# Altium PCB SIGFOX-PCB-RULER.PcbDoc
Units mm, origin at the board's own origin, x right, y up, seen from the top; angles counter-clockwise.
Board outline 154.95 x 25.41 mm, 2 copper layers (Top Layer, Bottom Layer); 69 components, 2 nets, 316 pads, 19 vias.
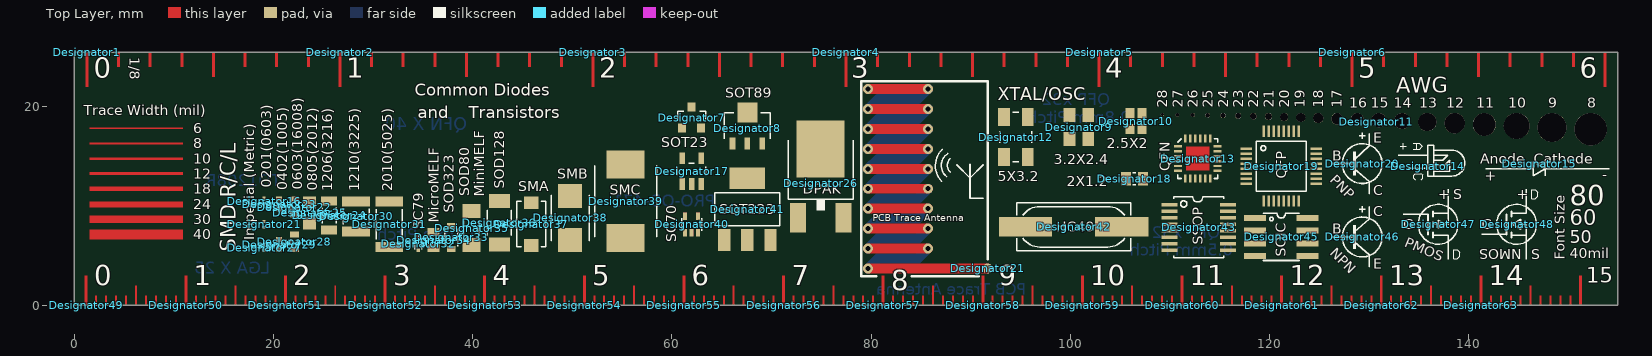
[diagram p0: Top Layer view]
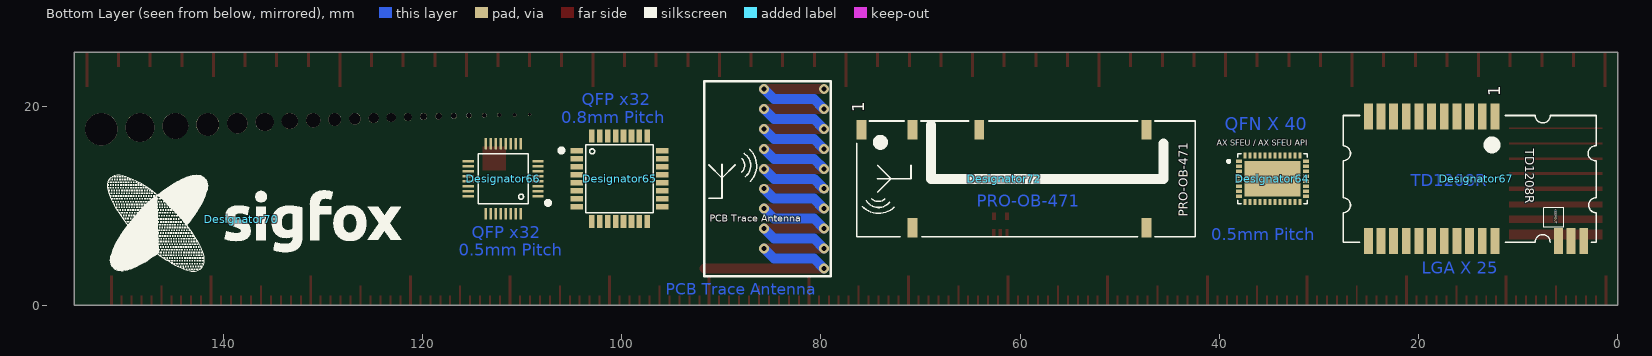
[diagram p1: Bottom Layer view, seen from below]

## Layer stack, top to bottom
Top Layer: signal copper 0.0356
Dielectric: dielectric 0.32, FR-4, Dk 4.8
Bottom Layer: signal copper 0.0356

## Board outline
-0.004,-0.004 154.944,-0.004 154.944,25.404 -0.004,25.404

## Design rules (kind name [scope] priority, off if disabled: settings)
Clearance [All] p1: gap=0.127
HoleToHoleClearance [All] p1: gap=0.025 allowstackedmicrovias=TRUE
MinimumSolderMaskSliver [All] p1: minsoldermaskwidth=0.051
PolygonConnect [All] p1: connectstyle=Relief reliefconductorwidth=0.254 reliefentries=4 polygonreliefangle="90 Angle"
RoutingVias [All] p1: holewidth=0.711 width=1.27 viastyle="Through Hole" minholewidth=0.711 minwidth=1.27 maxholewidth=0.711 maxwidth=1.27
SilkToSilkClearance [All] p1: silktosilkclearance=0.051
SilkscreenOverComponentPads [All] p1: minsilkscreentomaskgap=0.051
SolderMaskExpansion [All] p1: expansion=0.064
Width [All] p1: maxlimit=0.254 minlimit=0.254 preferedwidth=0.254
24 further rules are at their usual default settings.

## Components (designator, comment, footprint, x,y, rotation, side; value= is the part's Value field where it differs from the comment)
Designator1 "Comment" EDGE-INCHES-EIGTH 1.27,25.4 r0 top (schematic designator E$17)
Designator2 "Comment" EDGE-INCHES-EIGTH 26.67,25.4 r0 top (schematic designator E$18)
Designator3 "Comment" EDGE-INCHES-EIGTH 52.07,25.4 r0 top (schematic designator E$19)
Designator4 "Comment" EDGE-INCHES-EIGTH 77.47,25.4 r0 top (schematic designator E$20)
Designator5 "Comment" EDGE-INCHES-EIGTH 102.87,25.4 r0 top (schematic designator E$21)
Designator6 "Comment" EDGE-INCHES-EIGTH 128.27,25.4 r0 top (schematic designator E$22)
Designator7 "Comment" SOT23-3 61.976,18.796 r0 top (schematic designator E$34)
Designator8 "Comment" SOT89 67.564,18.034 r0 top (schematic designator E$32)
Designator9 "Comment" CRYSTAL-SMD-3.2X2.5 100.838,17.882 r90 top (schematic designator E$37)
Designator10 "Comment" CRYSTAL-SMD-2.5X2 106.578,18.491 r90 top (schematic designator E$38)
Designator11 "Comment" ALL-HOLES 109.22,19.304 r0 top (schematic designator E$46)
Designator12 "Comment" CRYSTAL-SMD-5X3.2 94.513,16.891 r90 top (schematic designator E$36)
Designator13 "Comment" QFN-24 112.776,14.732 r0 top (schematic designator E$55)
Designator14 "Comment" LED-GUIDE 135.89,13.97 r270 top (schematic designator E$53)
Designator15 "Comment" DIODE-SYMB 147.066,14.224 r0 top (schematic designator E$52)
Designator16 "Comment" 0201 19.05,10.465 r90 top (schematic designator E$16)
Designator17 "Comment" SOT23-5 61.976,13.462 r0 top (schematic designator E$33)
Designator18 "Comment" XTAL-2X1.2 106.426,12.7 r0 top (schematic designator E$40)
Designator19 "Comment" TQFP32-5MM 121.158,13.97 r0 top (schematic designator E$58)
Designator20 "Comment" PNP-SYMB 129.286,14.224 r0 top (schematic designator E$59)
Designator21 "Comment" 0201 19.05,8.128 r90 top (schematic designator E$63)
Designator21 "Comment" "PCB antenna 868 MHz or 915/920 MHz" 91.694,3.7 r90 top
Designator22 "Comment" 0603 22.098,9.855 r90 top (schematic designator E$24)
Designator23 "Comment" 0402 20.574,10.16 r90 top (schematic designator E$23)
Designator24 "Comment" 1206 25.578,9.017 r90 top (schematic designator E$26)
Designator25 "Comment" 0805 23.622,9.271 r90 top (schematic designator E$25)
Designator26 "Comment" DPAK 74.93,14.097 r0 top (schematic designator E$29)
Designator27 "Comment" 0201 19.05,5.791 r90 top (schematic designator E$60)
Designator28 "Comment" 0603 22.098,6.375 r90 top (schematic designator E$62)
Designator29 "Comment" 0402 20.574,6.096 r90 top (schematic designator E$61)
Designator30 "Comment" 1210 28.296,8.915 r270 top (schematic designator E$27)
Designator31 "Comment" 2010 31.623,8.128 r90 top (schematic designator E$28)
Designator32 "Comment" SC79_INFINEON 34.544,6.198 r90 top (schematic designator E$42)
Designator33 "Comment" SOD-323 37.846,6.807 r270 top (schematic designator E$48)
Designator34 "Comment" MICROMELF-R 36.068,6.553 r90 top (schematic designator E$41)
Designator35 "Comment" SOD80C 39.878,7.747 r90 top (schematic designator E$49)
Designator36 "Comment" SOD-128 42.672,8.28 r90 top (schematic designator E$47)
Designator37 "Comment" SMA-DIODE 45.872,8.153 r270 top (schematic designator E$43)
Designator38 "Comment" SMB-DIODE 49.784,8.763 r90 top locked (schematic designator E$44)
Designator39 "Comment" SMC 55.347,10.439 r90 top (schematic designator E$45)
Designator40 "Comment" SC70 61.976,8.128 r0 top (schematic designator E$35)
Designator41 "Comment" SOT223 67.564,9.652 r0 top (schematic designator E$31)
Designator42 "Comment" HC49UP 100.33,7.874 r0 top (schematic designator E$39)
Designator43 "Comment" TSSOP16 112.776,7.874 r270 top (schematic designator E$56)
Designator45 "Comment" SO08 121.158,6.858 r270 top (schematic designator E$57)
Designator46 "Comment" NPN-SYMB 129.286,6.858 r0 top (schematic designator E$54)
Designator47 "Comment" PMOS-SYMB 136.906,8.128 r0 top (schematic designator E$51)
Designator48 "Comment" NMOS-SYMB 144.78,8.128 r0 top (schematic designator E$50)
Designator49 "Comment" EDGE-MILLIMETERS 1.2,0 r0 top (schematic designator E$1)
Designator50 "Comment" EDGE-MILLIMETERS 11.2,0 r0 top (schematic designator E$2)
Designator51 "Comment" EDGE-MILLIMETERS 21.2,0 r0 top (schematic designator E$3)
Designator52 "Comment" EDGE-MILLIMETERS 31.2,0 r0 top (schematic designator E$4)
Designator53 "Comment" EDGE-MILLIMETERS 41.2,0 r0 top (schematic designator E$5)
Designator54 "Comment" EDGE-MILLIMETERS 51.2,0 r0 top (schematic designator E$6)
Designator55 "Comment" EDGE-MILLIMETERS 61.2,0 r0 top (schematic designator E$7)
Designator56 "Comment" EDGE-MILLIMETERS 71.2,0 r0 top (schematic designator E$8)
Designator57 "Comment" EDGE-MILLIMETERS 81.2,0 r0 top (schematic designator E$9)
Designator58 "Comment" EDGE-MILLIMETERS 91.2,0 r0 top (schematic designator E$10)
Designator59 "Comment" EDGE-MILLIMETERS 101.2,0 r0 top (schematic designator E$11)
Designator60 "Comment" EDGE-MILLIMETERS 111.2,0 r0 top (schematic designator E$12)
Designator61 "Comment" EDGE-MILLIMETERS 121.2,0 r0 top (schematic designator E$13)
Designator62 "Comment" EDGE-MILLIMETERS 131.2,0 r0 top (schematic designator E$14)
Designator63 "Comment" EDGE-MILLIMETERS 141.2,0 r0 top (schematic designator E$15)
Designator64 "Comment" QFN50P700X500X100-40N 34.659,12.7 r180 bottom
Designator65 "Comment" TQFP32-08 100.203,12.7 r0 bottom (schematic designator E$69)
Designator66 "Comment" TQFP32-5MM 111.887,12.7 r0 bottom (schematic designator E$70)
Designator67 "Comment" LGA25 14.224,12.7 r270 bottom
Designator70 "Comment" sigfox_logo 138.176,8.636 r180 bottom
Designator72 "Comment" PRO-OB-471 61.595,12.7 r90 bottom

## Footprints (in the part's own frame and the unit in brackets; to place one, negate y for a bottom-side part, rotate by r counter-clockwise, add the part's x,y. Pads: shape width x height; smd on the part's side, far side on the other; paste and mask are expansions set on the pad)
0201 [mm]
  rect 0.3x0.3 smd: P$1(-0.3,0) P$2(0.3,0)
0402 [mm]
  rect 0.5x0.6 smd: 1(-0.5,0) 2(0.5,0)
  silkscreen extent -0.1,-0.2 0.1,0.2
0603 [mm]
  rect 0.6x0.9 smd: 1(-0.75,0) 2(0.75,0)
  silkscreen extent -0.25,-0.35 0.25,0.35
0805 [mm]
  rect 1.2x1.3 smd: 1(-1.05,0) 2(1.05,0)
  silkscreen extent -0.2,-0.55 0.2,0.55
1206 [mm]
  rect 0.9x1.6 smd: 1(-1.45,0) 2(1.45,0)
  silkscreen extent -0.8,-0.7 0.8,0.7
1210 [mm]
  rect 1x2.8 smd: 1(-1.5,0) 2(1.5,0)
  silkscreen extent -0.8,-1.3 0.8,1.3
2010 [mm]
  rect 1x2.8 smd: P$1(-2.3,0) P$2(2.3,0)
  silkscreen extent -1.5,-1.3 1.5,1.3
ALL-HOLES [mm]
  round 0.321 hole 0.321 unplated: ""(0,-0.161)
  round 0.361 hole 0.361 unplated: ""(1.524,-0.18)
  round 0.405 hole 0.405 unplated: ""(3.048,-0.202)
  round 0.455 hole 0.455 unplated: ""(4.572,-0.228)
  round 0.511 hole 0.511 unplated: ""(6.096,-0.255)
  round 0.573 hole 0.573 unplated: ""(7.62,-0.287)
  round 0.644 hole 0.644 unplated: ""(9.144,-0.322)
  round 0.723 hole 0.723 unplated: ""(10.668,-0.361)
  round 0.812 hole 0.812 unplated: ""(12.235,-0.406)
  round 0.912 hole 0.912 unplated: ""(13.898,-0.456)
  round 1.02 hole 1.02 unplated: ""(15.663,-0.51)
  round 1.15 hole 1.15 unplated: ""(17.549,-0.575)
  round 1.29 hole 1.29 unplated: ""(19.568,-0.645)
  round 1.45 hole 1.45 unplated: ""(21.739,-0.725)
  round 1.63 hole 1.63 unplated: ""(24.078,-0.815)
  round 1.83 hole 1.83 unplated: ""(26.609,-0.915)
  round 2.05 hole 2.05 unplated: ""(29.348,-1.025)
  round 2.3 hole 2.3 unplated: ""(32.324,-1.15)
  round 2.59 hole 2.59 unplated: ""(35.568,-1.295)
  round 2.91 hole 2.91 unplated: ""(39.119,-1.455)
  round 3.26 hole 3.26 unplated: ""(43.003,-1.63)
CRYSTAL-SMD-2.5X2 [mm]
  rect 1.05x0.9 smd: 1(-0.795,-0.6) 2(0.795,-0.6) 3(0.795,0.6) 4(-0.795,0.6)
CRYSTAL-SMD-3.2X2.5 [mm]
  rect 1.4x1.2 smd: 1(-1.2,-0.95) 2(1.2,-0.95) 3(1.2,0.95) 4(-1.2,0.95)
CRYSTAL-SMD-5X3.2 [mm]
  rect 1.8x1.2 smd: 1(-2,-1.2) 2(2,-1.2) 3(2,1.2) 4(-2,1.2)
  silkscreen extent -2.5,-1.6 2.5,1.6
DIODE-SYMB [mm]
  silkscreen extent -5.4,-1.2 7,0.2
DPAK [mm]
  rect 1.6x3 smd: 1(-2.28,-5.31) 3(2.28,-5.31)
  rect 4.826x5.715 smd: 4(0,1.588)
  silkscreen extent -3.28,-4.59 3.28,2.47
EDGE-INCHES-EIGTH [mm]
  Top Layer region: -0.15,-3.5 0.15,-3.5 0.15,0 -0.15,0
  Top Layer region: 3.025,-1.5 3.325,-1.5 3.325,0 3.025,0
  Top Layer region: 6.2,-1.5 6.5,-1.5 6.5,0 6.2,0
  Top Layer region: 9.375,-1.5 9.675,-1.5 9.675,0 9.375,0
  Top Layer region: 12.55,-2.5 12.85,-2.5 12.85,0 12.55,0
  Top Layer region: 15.725,-1.5 16.025,-1.5 16.025,0 15.725,0
  Top Layer region: 18.9,-1.5 19.2,-1.5 19.2,0 18.9,0
  Top Layer region: 22.075,-1.5 22.375,-1.5 22.375,0 22.075,0
  Top Layer region: 25.25,-3.5 25.55,-3.5 25.55,0 25.25,0
EDGE-MILLIMETERS [mm]
  Top Layer region: 9.85,0 10.15,0 10.15,3 9.85,3
  Top Layer region: 8.9,0 9.1,0 9.1,1 8.9,1
  Top Layer region: 7.9,0 8.1,0 8.1,1 7.9,1
  Top Layer region: 6.9,0 7.1,0 7.1,1 6.9,1
  Top Layer region: 5.9,0 6.1,0 6.1,1 5.9,1
  Top Layer region: 3.9,0 4.1,0 4.1,1 3.9,1
  Top Layer region: 4.9,0 5.1,0 5.1,2 4.9,2
  Top Layer region: 2.9,0 3.1,0 3.1,1 2.9,1
  Top Layer region: 1.9,0 2.1,0 2.1,1 1.9,1
  Top Layer region: 0.9,0 1.1,0 1.1,1 0.9,1
  Top Layer region: -0.15,0 0.15,0 0.15,3 -0.15,3
HC49UP [mil]
  rect 210x76 smd: 1(-190,0) 2(190,0)
  silkscreen extent -225,-95 225,95
LED-GUIDE [mm]
  silkscreen extent -2.3,-3 1.37,3.7
LGA25 [mm]
  rect 2.6x0.89 smd: 1(-6.25,1.89) 2(-6.25,0.62) 3(-6.25,-0.65) 4(-6.25,-1.92) 5(-6.25,-3.19) 6(-6.25,-4.46) 7(-6.25,-5.73) 8(-6.25,-7) 9(-6.25,-8.27) 10(-6.25,-9.54) 11(-6.25,-10.81) 12(6.25,-10.81) 13(6.25,-9.54) 14(6.25,-8.27) 15(6.25,-7) 16(6.25,-5.73) 17(6.25,-4.46) 18(6.25,-3.19) 19(6.25,-1.92) 20(6.25,-0.65) 21(6.25,0.62) 22(6.25,1.89) 23(6.25,8.27) 24(6.25,9.54) 25(6.25,10.81)
  silkscreen extent -6.35,-13.35 6.35,12.05
MICROMELF-R [mm]
  rect 0.8x1.2 smd: A(0.8,0) C(-0.8,0)
  silkscreen extent -0.23,-0.55 0.23,0.55
NMOS-SYMB [mm]
  silkscreen extent -3.5,-3.5 2.15,3.5
NPN-SYMB [mm]
  silkscreen extent -3,-3 2,3.1
"PCB antenna 868 MHz or 915/920 MHz" [mm] "Design Note DN038, CC11xx/CC12xx"
  round 1 smd: 1(0,0)
  Top Layer lines w1: 0,12 0,0 ; 2,12 2,6 ; 4,12 4,6 ; 6,12 6,6 ; 8,12 8,6 ; 10,12 10,6 ; 12,12 12,6 ; 14,12 14,6 ; 16,12 16,6 ; 18,12 18,6
  Bottom Layer lines w1: 2,12 3,11 3,7 4,6 ; 4,12 5,11 5,7 6,6 ; 6,12 7,11 7,7 8,6 ; 8,12 9,11 9,7 10,6 ; 10,12 11,11 11,7 12,6 ; 12,12 13,11 13,7 14,6 ; 14,12 15,11 15,7 16,6 ; 16,12 17,11 17,7 18,6 ; 2,6 1,7 1,11 0,12 ; 0,12 0,12
  silkscreen extent -0.8,0 18.8,12.7
PMOS-SYMB [mm]
  silkscreen extent -3.5,-3.5 2.15,3.5
PNP-SYMB [mm]
  silkscreen extent -3,-3 2,3.1
PRO-OB-471 [mm]
  rect 1.95x1 smd: 1(4.9,14.3) 2(4.9,9.2) 3(-4.9,9.2) 4(-4.9,-14.3) 5(4.9,-14.3) 6(4.9,2.5)
  silkscreen extent -5.8,-19.2 5.8,14.8
QFN50P700X500X100-40N [mm] "QFN, 40-Leads, Body 5.0x7.0mm (max), Pitch 0.50mm, IPC Medium Density"
  rect 0.6x0.32 smd: 1(-3.35,1.75) 2(-3.35,1.25) 3(-3.35,0.75) 4(-3.35,0.25) 5(-3.35,-0.25) 6(-3.35,-0.75) 7(-3.35,-1.25) 8(-3.35,-1.75) 21(3.35,-1.75) 22(3.35,-1.25) 23(3.35,-0.75) 24(3.35,-0.25) 25(3.35,0.25) 26(3.35,0.75) 27(3.35,1.25) 28(3.35,1.75)
  rect 0.32x0.6 smd: 9(-2.75,-2.35) 10(-2.25,-2.35) 11(-1.75,-2.35) 12(-1.25,-2.35) 13(-0.75,-2.35) 14(-0.25,-2.35) 15(0.25,-2.35) 16(0.75,-2.35) 17(1.25,-2.35) 18(1.75,-2.35) 19(2.25,-2.35) 20(2.75,-2.35) 29(2.75,2.35) 30(2.25,2.35) 31(1.75,2.35) 32(1.25,2.35) 33(0.75,2.35) 34(0.25,2.35) 35(-0.25,2.35) 36(-0.75,2.35) 37(-1.25,2.35) 38(-1.75,2.35) 39(-2.25,2.35) 40(-2.75,2.35)
  rect 5.6x3.6 smd: 41(0,0)
  silkscreen extent -4.52,-2.5 3.5,2.5, body extent -3.5,-2.5 3.5,2.5, height 1
QFN-24 [mm]
  rect 0.8x0.25 smd: 1(-2,1.25) 2(-2,0.75) 3(-2,0.25) 4(-2,-0.25) 5(-2,-0.75) 6(-2,-1.25) 13(2,-1.25) 14(2,-0.75) 15(2,-0.25) 16(2,0.25) 17(2,0.75) 18(2,1.25)
  rect 0.25x0.8 smd: 7(-1.25,-2) 8(-0.75,-2) 9(-0.25,-2) 10(0.25,-2) 11(0.75,-2) 12(1.25,-2) 19(1.25,2) 20(0.75,2) 21(0.25,2) 22(-0.25,2) 23(-0.75,2) 24(-1.25,2)
  Top Layer region: -1.2,-1.2 1.2,-1.2 1.2,1.2 -1.2,1.2
  silkscreen extent -2,-2 2,2
SC70 [mm]
  rect 0.4x0.75 smd: 1(-0.65,-0.825) 2(0,-0.825) 3(0.65,-0.825) 4(0.65,0.825) 5(-0.65,0.825)
  Top Layer region: 0.508,-1.168 0.838,-1.168 0.838,-0.483 0.508,-0.483
  Top Layer region: -0.165,-1.168 0.165,-1.168 0.165,-0.483 -0.165,-0.483
  Top Layer region: -0.838,-1.168 -0.508,-1.168 -0.508,-0.483 -0.838,-0.483
  Top Layer region: 0.45,0.45 0.85,0.45 0.85,1.2 0.45,1.2
  Top Layer region: -0.85,0.45 -0.45,0.45 -0.45,1.2 -0.85,1.2
  silkscreen extent -1,-0.62 1,0.62
SC79_INFINEON [mm]
  rect 0.35x0.35 smd: A(0.675,0) C(-0.675,0)
  silkscreen extent -0.55,-0.35 0.55,0.35
sigfox_logo [mm]
  silkscreen extent -13.42,-5.28 16.04,4.48
SMA-DIODE [mm]
  rect 1.27x1.47 smd: A(-2.15,0) C(2.15,0)
  silkscreen extent -2.3,-1.45 2.3,1.45
SMB-DIODE [mm]
  rect 2.4x2.4 smd: A(2.2,0) C(-2.2,0)
  silkscreen extent -2.26,-1.91 2.26,1.91
SMC [mm]
  rect 2.8x3.8 smd: A(3.7,0) C(-3.7,0)
  silkscreen extent -3.56,-3.1 3.56,3.1
SO08 [mil]
  rect 24x87 smd: 1(-75,-103) 2(-25,-103) 3(25,-103) 4(75,-103) 5(75,103) 6(25,103) 7(-25,103) 8(-75,103)
  silkscreen extent -93,-71 93,71
SOD80C [mm]
  rect 1.4x1.8 smd: A(1.7,0) C(-1.7,0)
  silkscreen extent -0.76,-0.79 0.76,0.79
SOD-128 [mm]
  rect 1.4x2.1 smd: A(2.2,0) C(-2.2,0)
  silkscreen extent -1.27,-1.2 1.27,1.2
SOD-323 [mm]
  rect 0.63x0.83 smd: 1(-1.15,0) 2(1.15,0)
  silkscreen extent -0.9,-0.65 0.9,0.65
SOT23-3 [mm]
  rect 0.8x0.9 smd: 1(-0.95,-1) 2(0.95,-1) 3(0,1.1)
  silkscreen extent -1.4,-0.1 1.4,0.7
SOT23-5 [mm]
  rect 0.55x1.2 smd: 1(-0.95,-1.3) 2(0,-1.3) 3(0.95,-1.3) 4(0.95,1.3) 5(-0.95,1.3)
  silkscreen extent -1.42,-0.43 1.42,0.81
SOT89 [mm]
  rect 0.58x1.2 smd: 1(-1.5,-1.8) 2(0,-1.8) 3(1.5,-1.8)
  rect 2x2 smd: 4(0,1.3)
  silkscreen extent -2.3,-1.3 2.3,1.31
SOT223 [mil]
  rect 48x88 smd: 1(-91,-122) 2(0,-122) 3(91,-122)
  rect 141.73x86.61 smd: 4(0,122.01)
  silkscreen extent -129,-65 129,65
TQFP32-5MM [mil]
  rect 45x10 smd: 1(-137.8,68.9) 2(-137.8,49.21) 3(-137.8,29.53) 4(-137.8,9.84) 5(-137.8,-9.84) 6(-137.8,-29.53) 7(-137.8,-49.21) 8(-137.8,-68.9) 17(137.8,-68.9) 18(137.8,-49.21) 19(137.8,-29.53) 20(137.8,-9.84) 21(137.8,9.84) 22(137.8,29.53) 23(137.8,49.21) 24(137.8,68.9)
  rect 10x45 smd: 9(-68.9,-137.8) 10(-49.21,-137.8) 11(-29.53,-137.8) 12(-9.84,-137.8) 13(9.84,-137.8) 14(29.53,-137.8) 15(49.21,-137.8) 16(68.9,-137.8) 25(68.9,137.8) 26(49.21,137.8) 27(29.53,137.8) 28(9.84,137.8) 29(-9.84,137.8) 30(-29.53,137.8) 31(-49.21,137.8) 32(-68.9,137.8)
  silkscreen extent -98,-98 98,98
TQFP32-08 [mil]
  rect 50x22 smd: 1(169,-110.24) 2(169,-78.74) 3(169,-47.24) 4(169,-15.75) 5(169,15.75) 6(169,47.24) 7(169,78.74) 8(169,110.24) 17(-169,110.24) 18(-169,78.74) 19(-169,47.24) 20(-169,15.75) 21(-169,-15.75) 22(-169,-47.24) 23(-169,-78.74) 24(-169,-110.24)
  rect 22x50 smd: 9(110.24,169) 10(78.74,169) 11(47.24,169) 12(15.75,169) 13(-15.75,169) 14(-47.24,169) 15(-78.74,169) 16(-110.24,169) 25(-110.24,-169) 26(-78.74,-169) 27(-47.24,-169) 28(-15.75,-169) 29(15.75,-169) 30(47.24,-169) 31(78.74,-169) 32(110.24,-169)
  silkscreen extent -134,-134 134,134
TSSOP16 [mm]
  rect 0.35x1.6 smd: 1(-2.225,-2.85) 2(-1.575,-2.85) 3(-0.925,-2.85) 4(-0.275,-2.85) 5(0.375,-2.85) 6(1.025,-2.85) 7(1.675,-2.85) 8(2.325,-2.85) 9(2.325,3.05) 10(1.675,3.05) 11(1.025,3.05) 12(0.375,3.05) 13(-0.275,3.05) 14(-0.925,3.05) 15(-1.575,3.05) 16(-2.225,3.05)
  silkscreen extent -3,-2.4 3.1,2.6
XTAL-2X1.2 [mm]
  rect 1x1.4 smd: P$1(-0.85,0) P$2(0.85,0)
  silkscreen extent -0.15,-0.6 0.15,0.6

## Via types
v1: diameter 1, hole 0.5, Top Layer to Bottom Layer, 19 vias

## Nets (pads, with @x,y where several pads share a name; then routed paths per layer and width w, separated by ;. In a path a pad name is that pad's centre, name@x,y a point inside that pad or via, vN(x,y) a via of type N, cw(c..) or ccw(c..) an arc to the next point about the centre after c; other vN are vias at no path point)
ANT_FEED: Designator21.1
  other v1: 79.694,3.7 79.694,5.7 85.694,5.7 79.694,7.7 85.694,7.7 79.694,9.7 85.694,9.7 79.694,11.7 85.694,11.7 79.694,13.7 85.694,13.7 79.694,15.7 85.694,15.7 79.694,17.7 85.694,17.7 79.694,19.7 85.694,19.7 79.694,21.7 85.694,21.7
S$1: 
pads on no net: Designator7.1 Designator7.2 Designator7.3 Designator8.1 Designator8.2 Designator8.3 Designator8.4 Designator9.1 Designator9.2 Designator9.3 Designator9.4 Designator10.1 Designator10.2 Designator10.3 Designator10.4 Designator11. Designator12.1 Designator12.2 Designator12.3 Designator12.4 Designator13.1 Designator13.2 Designator13.3 Designator13.4 Designator13.5 Designator13.6 Designator13.7 Designator13.8 Designator13.9 Designator13.10 Designator13.11 Designator13.12 Designator13.13 Designator13.14 Designator13.15 Designator13.16 Designator13.17 Designator13.18 Designator13.19 Designator13.20 Designator13.21 Designator13.22 Designator13.23 Designator13.24 Designator16.P$1 Designator16.P$2 Designator17.1 Designator17.2 Designator17.3 Designator17.4 Designator17.5 Designator18.P$1 Designator18.P$2 Designator19.1 Designator19.2 Designator19.3 Designator19.4 Designator19.5 Designator19.6 Designator19.7 Designator19.8 Designator19.9 Designator19.10 Designator19.11 Designator19.12 Designator19.13 Designator19.14 Designator19.15 Designator19.16 Designator19.17 Designator19.18 Designator19.19 Designator19.20 Designator19.21 Designator19.22 Designator19.23 Designator19.24 Designator19.25 Designator19.26 Designator19.27 Designator19.28 Designator19.29 Designator19.30 Designator19.31 Designator19.32 Designator21.P$1 Designator21.P$2 Designator22.1 Designator22.2 Designator23.1 Designator23.2 Designator24.1 Designator24.2 Designator25.1 Designator25.2 Designator26.1 Designator26.3 Designator26.4 Designator27.P$1 Designator27.P$2 Designator28.1 Designator28.2 Designator29.1 Designator29.2 Designator30.1 Designator30.2 Designator31.P$1 Designator31.P$2 Designator32.A Designator32.C Designator33.1 Designator33.2 Designator34.A Designator34.C Designator35.A Designator35.C Designator36.A Designator36.C Designator37.A Designator37.C Designator38.A Designator38.C Designator39.A Designator39.C Designator40.1 Designator40.2 Designator40.3 Designator40.4 Designator40.5 Designator41.1 Designator41.2 Designator41.3 Designator41.4 Designator42.1 Designator42.2 Designator43.1 Designator43.2 Designator43.3 Designator43.4 Designator43.5 Designator43.6 Designator43.7 Designator43.8 Designator43.9 Designator43.10 Designator43.11 Designator43.12 Designator43.13 Designator43.14 Designator43.15 Designator43.16 Designator45.1 Designator45.2 Designator45.3 Designator45.4 Designator45.5 Designator45.6 Designator45.7 Designator45.8 Designator64.1 Designator64.2 Designator64.3 Designator64.4 Designator64.5 Designator64.6 Designator64.7 Designator64.8 Designator64.9 Designator64.10 Designator64.11 Designator64.12 Designator64.13 Designator64.14 Designator64.15 Designator64.16 Designator64.17 Designator64.18 Designator64.19 Designator64.20 Designator64.21 Designator64.22 Designator64.23 Designator64.24 Designator64.25 Designator64.26 Designator64.27 Designator64.28 Designator64.29 Designator64.30 Designator64.31 Designator64.32 Designator64.33 Designator64.34 Designator64.35 Designator64.36 Designator64.37 Designator64.38 Designator64.39 Designator64.40 Designator64.41 Designator65.1 Designator65.2 Designator65.3 Designator65.4 Designator65.5 Designator65.6 Designator65.7 Designator65.8 Designator65.9 Designator65.10 Designator65.11 Designator65.12 Designator65.13 Designator65.14 Designator65.15 Designator65.16 Designator65.17 Designator65.18 Designator65.19 Designator65.20 Designator65.21 Designator65.22 Designator65.23 Designator65.24 Designator65.25 Designator65.26 Designator65.27 Designator65.28 Designator65.29 Designator65.30 Designator65.31 Designator65.32 Designator66.1 Designator66.2 Designator66.3 Designator66.4 Designator66.5 Designator66.6 Designator66.7 Designator66.8 Designator66.9 Designator66.10 Designator66.11 Designator66.12 Designator66.13 Designator66.14 Designator66.15 Designator66.16 Designator66.17 Designator66.18 Designator66.19 Designator66.20 Designator66.21 Designator66.22 Designator66.23 Designator66.24 Designator66.25 Designator66.26 Designator66.27 Designator66.28 Designator66.29 Designator66.30 Designator66.31 Designator66.32 Designator67.1 Designator67.2 Designator67.3 Designator67.4 Designator67.5 Designator67.6 Designator67.7 Designator67.8 Designator67.9 Designator67.10 Designator67.11 Designator67.12 Designator67.13 Designator67.14 Designator67.15 Designator67.16 Designator67.17 Designator67.18 Designator67.19 Designator67.20 Designator67.21 Designator67.22 Designator67.23 Designator67.24 Designator67.25 Designator72.1 Designator72.2 Designator72.3 Designator72.4 Designator72.5 Designator72.6

## Other copper
Top Layer:
  rectangle: 1.524,6.604 10.922,7.62
  rectangle: 1.524,8.255 10.922,9.017
  rectangle: 1.524,9.83 10.922,10.439
  rectangle: 1.524,11.455 10.922,11.913
  rectangle: 1.524,13.056 10.922,13.36
  rectangle: 1.524,14.605 10.922,14.859
  rectangle: 1.524,16.154 10.922,16.358
  rectangle: 1.524,17.704 10.922,17.856
  text "SIGFOX PCB RULER TOP LAYER" at 28.804,32.05 h2.54
Bottom Layer:
  text "SIGFOX PCB RULER  BOTTOM LAYER" at 95.758,31.877 h2.54
  text "QFP x32" at 104.013,20.066 h1.2
  text "0.8mm Pitch" at 106.045,18.288 h1.2
  text "TD1208R" at 20.803,11.963 h1.2
  text "PRO-OB-471" at 64.338,9.881 h1.2
  text "QFP x32" at 115.062,6.731 h1.2
  text "0.5mm Pitch" at 40.818,6.553 h1.2
  text "0.5mm Pitch" at 116.332,4.953 h1.2
  text "LGA X 25" at 19.685,3.175 h1.2
  text "PCB Trace Antenna" at 95.555,1.067 h1.14

## Silkscreen, mask and mechanical layers (free items; w line width, h text height)
Top Overlay:
  lines w0.25: 84.074,2.904 90.78,2.904
  text "SIGFOX PCB RULER TOP SILKSCREEN" at 28.804,32.05 h2.54
  text "1/8" at 5.588,24.892 h1.02 r270
  text "0" at 1.937,22.86 h2
  text "1" at 27.305,22.86 h2
  text "2" at 52.705,22.86 h2
  text "3" at 77.978,22.86 h2
  text "4" at 103.505,22.86 h2
  text "5" at 128.905,22.86 h2
  text "6" at 151.13,22.86 h2
  text "AWG" at 132.69,21.336 h1.52
  text "Common Diodes" at 34.163,21.031 h1.2
  text "SOT89" at 65.354,20.828 h1.02
  text "XTAL/OSC" at 92.71,20.574 h1.27
  text "28" at 109.728,19.812 h1.02 r90
  text "27" at 111.252,19.812 h1.02 r90
  text "26" at 112.776,19.812 h1.02 r90
  text "25" at 114.3,19.812 h1.02 r90
  text "24" at 115.824,19.812 h1.02 r90
  text "23" at 117.348,19.812 h1.02 r90
  text "22" at 118.872,19.812 h1.02 r90
  text "21" at 120.396,19.812 h1.02 r90
  text "20" at 121.971,19.812 h1.02 r90
  text "19" at 123.546,19.812 h1.02 r90
  text "18" at 125.4,19.812 h1.02 r90
  text "17" at 127.254,19.812 h1.02 r90
  text "16" at 127.965,19.812 h1.02
  text "15" at 130.124,19.812 h1.02
  text "14" at 132.461,19.812 h1.02
  text "13" at 135.001,19.812 h1.02
  text "12" at 137.744,19.812 h1.02
  text "11" at 140.716,19.812 h1.02
  text "10" at 143.942,19.812 h1.02
  text "9" at 147.98,19.812 h1.02
  text "8" at 151.867,19.812 h1.02
  text "Trace Width (mil)" at 0.965,19.075 h1.02
  text "and    Transistors" at 34.468,18.796 h1.2
  text "6" at 11.938,17.272 h1.02
  text "SOT23" at 58.928,15.875 h1.02
  text "8" at 11.938,15.748 h1.02
  text "2.5X2" at 103.632,15.748 h1.02
  text "10" at 11.938,14.224 h1.02
  text "3.2X2.4" at 98.349,14.173 h1.02
  text "QFN" at 109.982,13.462 h1.02 r90
  text "12" at 11.938,12.7 h1.02
  text "SMB" at 48.489,12.7 h1.02
  text "QFP" at 121.666,12.7 h1.02 r90
  text "5X3.2" at 92.71,12.446 h1.02
  text "2X1.2" at 99.644,11.938 h1.02
  text "0201(0603)" at 19.787,11.786 h1.02 r90
  text "SOD128" at 43.18,11.684 h1.02 r90
  text "0603(16008)" at 22.885,11.582 h1.02 r90
  text "0402(1005)" at 21.387,11.557 h1.02 r90
  text "0805(2012)" at 24.384,11.481 h1.02 r90
  text "1206(3216)" at 25.908,11.43 h1.02 r90
  text "1210(3225)" at 28.6,11.43 h1.02 r90
  text "2010(5025)" at 31.902,11.43 h1.02 r90
  text "SMA" at 44.577,11.43 h1.02
  text "18" at 11.938,11.176 h1.02
  text "DPAK" at 73.152,11.176 h1.02
  text "SMC" at 53.746,11.074 h1.02
  text "SOD80" at 39.649,10.922 h1.02 r90
  text "MiniMELF" at 41.173,10.897 h1.02 r90
  text "80" at 150.114,10.058 h2.03
  text "24" at 11.938,9.652 h1.02
  text "SOD323" at 38.1,9.296 h1.02 r90
  text "SOT223" at 64.745,9.119 h1.02
  text "PCB Trace Antenna" at 80.162,8.433 h0.68
  text "MicroMELF" at 36.576,8.28 h1.02 r90
  text "30" at 11.938,8.128 h1.02
  text "60" at 150.114,8.026 h1.52
  text "SC79" at 35.052,7.569 h1.02 r90
  text "HC49" at 98.552,7.366 h1.02
  text "40" at 11.938,6.604 h1.02
  text "Imperial (Metric)" at 18.059,6.553 h1.02 r90
  text "SC70" at 60.452,6.35 h1.02 r90
  text "50" at 150.114,6.248 h1.27
  text "SSOP" at 113.284,6.096 h1.02 r90
  text "SMD R/C/L" at 16.205,5.385 h1.52 r90
  text "SOIC" at 121.615,4.877 h1.02 r90
  text "40mil" at 150.114,4.699 h1.02
  text "Font Size" at 149.606,4.572 h1.02 r90
  text "15" at 151.769,2.287 h1.52
  text "0" at 2,2 h2
  text "1" at 12,2 h2
  text "2" at 22,2 h2
  text "3" at 32,2 h2
  text "4" at 42,2 h2
  text "5" at 52,2 h2
  text "6" at 62,2 h2
  text "7" at 72,2 h2
  text "9" at 92.786,2.007 h2
  text "10" at 102,2 h2
  text "11" at 112,2 h2
  text "12" at 122,2 h2
  text "13" at 132,2 h2
  text "14" at 142,2 h2
  text "8" at 82,1.492 h2
Bottom Overlay:
  circle w0.508: c106.034,15.545 r0.152
  circle w0.508: c107.38,10.287 r0.152
  text "SIGFOX PCB RULER BOTTOM SILKSCREEN" at 93.294,36.093 h2.54
  text "PCB Trace Antenna" at 91.161,8.382 h0.7
Top Paste:
  text "SIGFOX PCB RULER  TOP PASTE" at 28.804,32.05 h2.54
Bottom Paste:
  text "SIGFOX PCB RULER BOTTOM PASTE" at 88.722,35.839 h2.54
Top Solder:
  rectangle: 1.524,17.577 10.922,17.983
  rectangle: 1.524,16.027 10.922,16.485
  rectangle: 1.524,14.478 10.922,14.986
  rectangle: 1.524,12.979 10.922,13.437
  rectangle: 1.524,11.379 10.922,11.989
  rectangle: 1.524,9.754 10.922,10.516
  rectangle: 1.524,8.179 10.922,9.093
  rectangle: 1.524,6.528 10.922,7.696
  text "SIGFOX PCB RULER TOP SOLDER MASK" at 28.804,32.05 h2.54
Bottom Solder:
  text "SIGFOX PCB RULER BOTTOM SOLDER MASK" at 102.997,32.029 h2.54
Board Outline:
  the board outline again, w0.254
  text "SIGFOX PCB RULER BOARD OUTLINE" at 28.804,32.05 h2.54
Fabrication Notes:
  lines w0.025: 43.301,90.904 68.066,90.904 ; 44.138,93.19 44.138,91.158 45.299,91.158 ; 45.493,91.158 46.267,93.19 47.041,91.158 ; 45.783,91.836 46.751,91.836 ; 47.234,93.19 48.008,92.223 ; 48.008,91.158 48.008,92.223 ; 48.783,93.19 48.008,92.223 ; 49.266,92.223 50.04,92.223 ; 50.524,91.158 49.266,91.158 49.266,93.19 50.524,93.19 ; 51.105,91.158 51.105,93.19 51.976,93.19 52.266,93.094 52.363,92.997 52.459,92.803 52.459,92.61 52.363,92.416 52.266,92.32 51.976,92.223 51.105,92.223 ; 51.782,92.223 52.459,91.158 ; 55.072,91.449 55.266,91.255 55.556,91.158 55.943,91.158 56.233,91.255 56.427,91.449 56.427,91.739 56.33,91.932 56.233,92.029 56.04,92.126 55.459,92.32 55.266,92.416 55.169,92.513 55.072,92.707 55.072,92.9 55.266,93.094 55.556,93.19 55.943,93.19 56.233,93.094 56.427,92.9 ; 56.814,93.19 58.168,93.19 ; 57.491,91.158 57.491,93.19 ; 58.362,91.158 59.136,93.19 59.91,91.158 ; 58.652,91.836 59.62,91.836 ; 61.749,91.642 61.652,91.449 61.458,91.255 61.265,91.158 60.878,91.158 60.684,91.255 60.491,91.449 60.394,91.642 60.297,91.932 60.297,92.416 60.394,92.707 60.491,92.9 60.684,93.094 60.878,93.19 61.265,93.19 61.458,93.094 61.652,92.9 61.749,92.707 ; 62.426,91.158 62.426,93.19 ; 62.426,91.836 63.781,93.19 ; 62.91,92.32 63.781,91.158 ; 64.458,93.19 64.458,91.739 64.555,91.449 64.748,91.255 65.039,91.158 65.232,91.158 65.522,91.255 65.716,91.449 65.813,91.739 65.813,93.19 ; 66.587,91.158 66.587,93.19 67.458,93.19 67.748,93.094 67.845,92.997 67.941,92.803 67.941,92.513 67.845,92.32 67.748,92.223 67.458,92.126 66.587,92.126
  lines w0.254: 24.397,82.421 25.667,83.691 ; 24.397,87.501 25.667,86.231 ; 64.719,83.691 25.667,83.691 ; 64.719,86.231 25.667,86.231 ; 25.667,83.691 24.397,84.961 25.667,86.231 ; 0,0 154.94,0 154.94,25.4 0,25.4 0,0
  text "TOP SIDE LAYER 1 COPPER" at 67.894,85.66 h1.52
  text "BOTTOM SIDE LAYER 2 COPPER" at 67.647,83.208 h1.52
  text "FAB NOTES" at 24.617,75.995 h2.03
  text "ALL DIMENSIONS ARE IN MM UNLESS OTHERWISE SPECIFIED." at 23.576,72.185 h1.52
  text "BAORD MATERIAL : 180 Tg  FR-4 OR EQUIVALENT 1.6mm +/- 10% THICK EPOXY LAMINATE, RoHS COMPLIANT" at 23.703,69.797 h1.52
  text "PCB TO BE FABRICATED TO IPC-6012 CLASS 2 AND WORKMANSHIP QUALITY TO CONFORM IPC-A-600 CURRENT REVISIONS." at 23.576,66.802 h1.52
  text "LAYER STACKUP: 2- LAYER" at 23.576,64.057 h1.52
  text "FINISH LAYERS: 1/2  Oz. TO 1 Oz." at 23.576,61.569 h1.52
  text "LEAD FREE HASL" at 61.422,61.542 h1.52
  text "PLATED HOLES : MINIMUM WALL THICKNESS OF .0254mm AND" at 23.576,58.716 h1.52
  text "MINIMUM ANNULAR RING OF .0508mm" at 90.251,58.621 h1.52
  text "MAX WARP/TWIST OF BOARD SHALL NOT EXCEED 0.75%." at 23.576,55.548 h1.52
  text "APPLY LPI SOLDERMASK TO BOTH SIDES OVER BARE COPPER (SMOBC), COLOR GREEN,CONFORM TO IPC-SM-840." at 23.576,52.144 h1.52
  text "BOARDS MUST BE ELECTRICALLY TESTED USING SUPPLIED IPC-D-356A NETLIST" at 23.576,48.842 h1.52
  text "APPLY LPI SILKSCREEN OR EQUIVALENT ON BOTH SIDES OF BOARD WITH WHITE EPOXY INK." at 23.576,45.794 h1.52
  text "FINISHED BOARD SHOULD BE FREE FROM BURRS AND SHARP EDGES." at 23.576,43.127 h1.52
  text "100% ELECTRICAL TEST REQUIRED FOR CONTINUITY." at 23.576,40.333 h1.52
  text "SIGFOX PCB RULER FAB NOTES" at 28.804,32.05 h2.54
Mechanical 6:
  text "SIGFOX PCB RULER BOARD OUTLINE" at 28.804,32.05 h2.54
Drill Drawing:
  text ".LEGEND" at 45.542,35.204 h1.5
  text "SIGFOX PCB RULER DRILL DRAWING" at 28.397,28.727 h2.54

## Dimensions
0,0 to 154.94,0 on Fabrication Notes
0,0 to 0,25.4 on Fabrication Notes

## Text inside footprints (layer, text, board x,y; h text height)
Designator15: Top Overlay "Anode  Cathode" at 141.148,14.224 h1.02; Top Overlay "+" at 141.566,12.524 h1.02; Top Overlay "-" at 153.366,12.624 h1.02
Designator20: Top Overlay "PNP" at 125.986,12.524 h1.02 r315; Top Overlay "B" at 126.286,14.524 h1.02; Top Overlay "E" at 130.386,16.324 h1.02; Top Overlay "C" at 130.386,11.024 h1.02
Designator46: Top Overlay "NPN" at 125.986,5.158 h1.02 r315; Top Overlay "B" at 126.286,7.158 h1.02; Top Overlay "C" at 130.386,8.958 h1.02; Top Overlay "E" at 130.386,3.658 h1.02
Designator47: Top Overlay "PMOS" at 133.465,5.928 h1.02 r337.5; Top Overlay "+" at 136.906,10.628 h1.02; Top Overlay "S" at 138.406,10.628 h1.02; Top Overlay "G" at 133.406,7.628 h1.02
Designator48: Top Overlay "NMOS" at 145.28,5.628 h1.02 r180; Top Overlay "+" at 144.78,10.628 h1.02; Top Overlay "S" at 146.28,4.628 h1.02; Top Overlay "G" at 141.28,7.628 h1.02
Designator64: Bottom Layer "QFN X 40" at 39.446,17.577 h1.27; Bottom Overlay "AX SFEU / AX SFEU API" at 40.259,15.82 h1
Designator67: Bottom Overlay "TD1208R" at 9.594,15.7 h1.5 r90; Bottom Overlay "KEEPOUT" at 6.441,9.627 h0.4 r90; Bottom Overlay "1" at 11.786,21.006 h1.2 r270; Mechanical 13 "KEEPOUT" at 6.441,9.627 h0.4 r90; Mechanical 13 "TD1208R" at 9.594,15.7 h1.5 r90
Designator72: Bottom Overlay "PRO-OB-471" at 42.875,8.9 h1.5 r270; Bottom Overlay "1" at 75.623,19.38 h1.2 r270